# Altium PCB PCB1.PcbDoc
Units mil, origin at the board's own origin, x right, y up, seen from the top; angles counter-clockwise.
Board outline 4900 x 1900 mil, 2 copper layers (Top Layer, Bottom Layer); 41 components, 30 nets, 161 pads, 34 vias.
Unrouted connection lines stored in the file: 4.
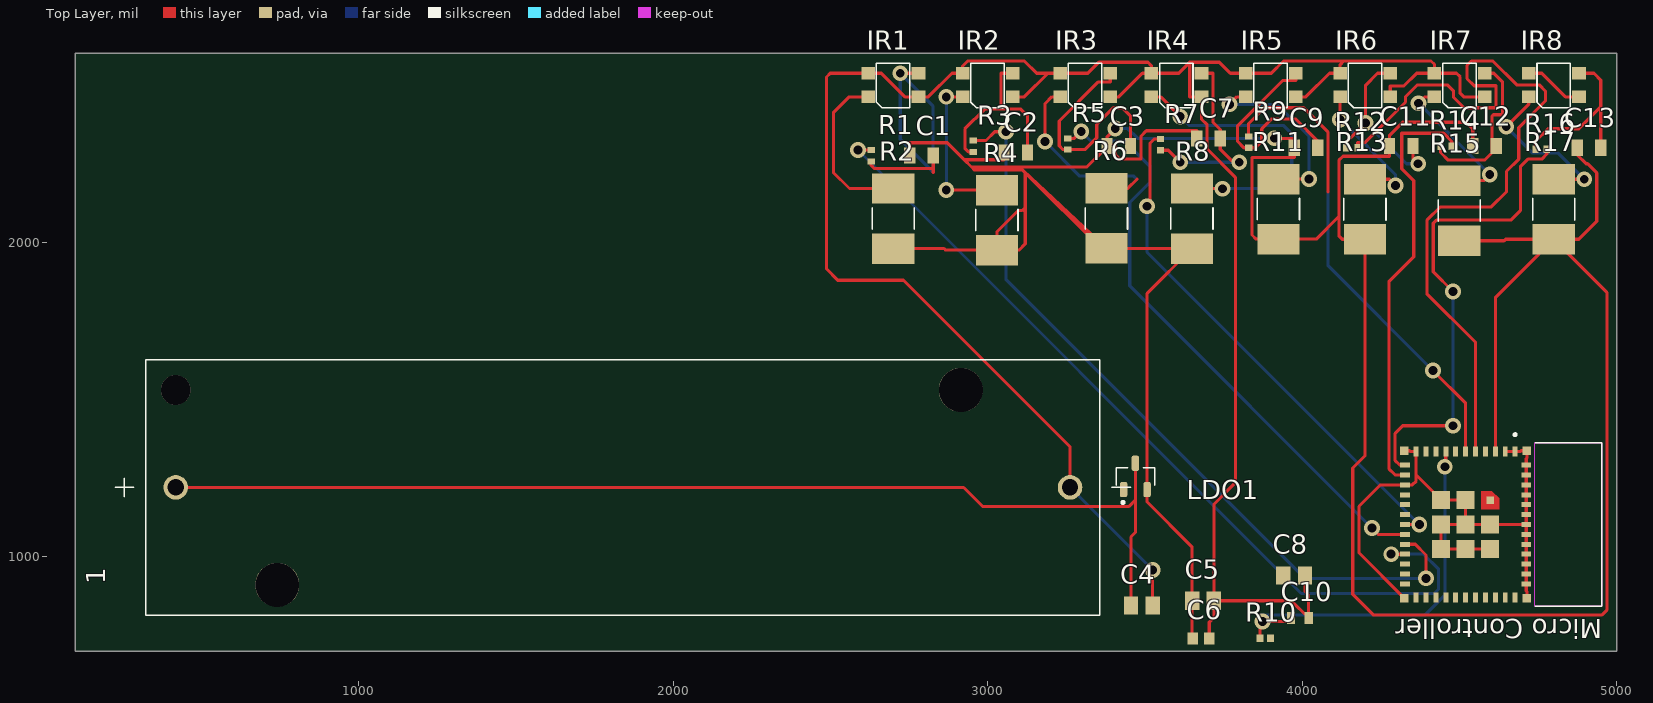
[diagram p0: Top Layer view]
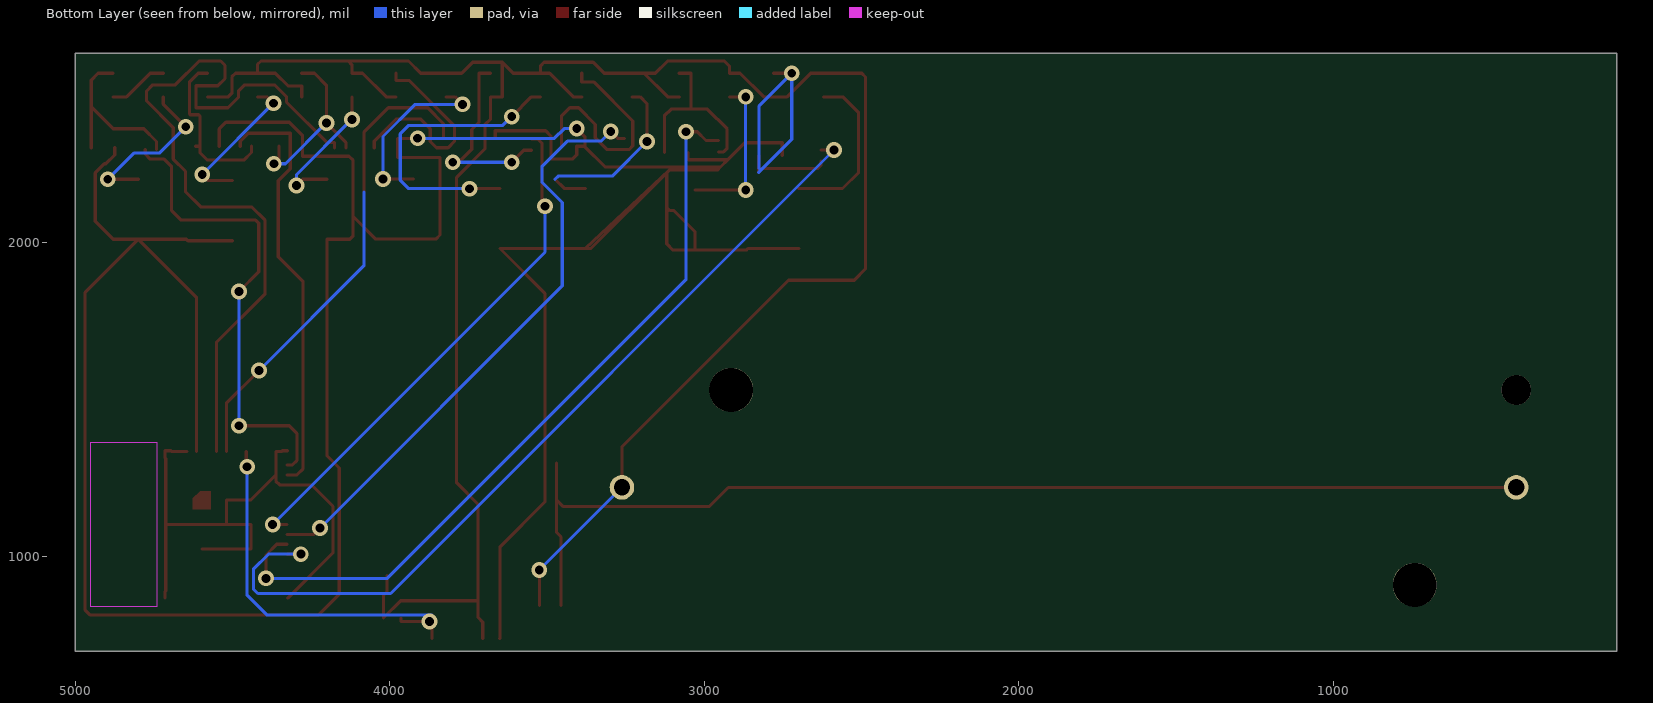
[diagram p1: Bottom Layer view, seen from below]

## Layer stack, top to bottom
Top Solder: solder mask 0.4, Solder Resist, Dk 3.5
Top Layer: signal copper 1.4
Dielectric 1: dielectric 12.6, FR-4, Dk 4.8
Bottom Layer: signal copper 1.4
Bottom Solder: solder mask 0.4, Solder Resist, Dk 3.5

## Board outline
100,700 5000,700 5000,2600 100,2600

## Design rules (kind name [scope] priority, off if disabled: settings)
Clearance [All] p1: gap=10 ignorepadtopadclearanceinfootprint=FALSE except(0: Arc-Hole Track-Hole SMDPad-Hole THPad-Hole Via-Hole Fill-Hole Poly-Hole Region-Hole Text-Hole)
PolygonConnect [All] p1: connectstyle=Relief reliefconductorwidth=10 reliefentries=4 polygonreliefangle="90 Angle" airgapwidth=10
RoomDefinition Sheet2 [InComponentClass('Sheet2')] p1: confinementstyle=ConfineIn formatcopy=TRUE lockcomponents=FALSE outline -2600,-7800 -600,-7800 -600,-6800 -2600,-6800
RoutingVias [All] p1: holewidth=28 width=50 viastyle="Through Hole" minholewidth=28 minwidth=50 maxholewidth=28 maxwidth=50
SolderMaskExpansion [All] p1: expansion=4 istentingtop=FALSE
Width [All] p1: maxlimit=10 minlimit=10 preferedwidth=10
30 further rules are at their usual default settings.

## Classes and differential pairs
component class Sheet2: C1 C2 C3 C7 IR1 IR2 IR3 IR4 R1 R2 R3 R4 R5 R6 R7 R8

## Components (designator, comment, footprint, x,y, rotation, side; value= is the part's Value field where it differs from the comment)
1 "" BAT_1043 1840.59,1220.16 r180 top (schematic designator 3V7)
C1 "10nF" WCAP-CSGP_0805_L2W1.25H1.25 2790,2275 r0 top (schematic designator C13)
C2 "10nF" WCAP-CSGP_0805_L2W1.25H1.25 3090,2285 r0 top (schematic designator C11)
C3 "10nF" WCAP-CSGP_0805_L2W1.25H1.25 3417.6,2305 r0 top (schematic designator C12)
C4 "1pf" CAPC2012X88N 3490.55,845 r0 top (schematic designator C3)
C5 "10pf" CAPC2012X88N 3685,860 r0 top (schematic designator C4)
C6 "0.1uF" CAPC1608X90X35NL10T15 3678.43,740 r0 top (schematic designator C2)
C7 "10nF" WCAP-CSGP_0805_L2W1.25H1.25 3702.4,2330 r0 top (schematic designator C10)
C8 "10uF" CAPC2012X88N 3975,940 r0 top (schematic designator C1)
C9 "10nF" WCAP-CSGP_0805_L2W1.25H1.25 4012.4,2300 r0 top
C10 "1uF" CAPC1608X90N 3993,805 r0 top (schematic designator C5)
C11 "10nF" WCAP-CSGP_0805_L2W1.25H1.25 4315,2305 r0 top (schematic designator C8)
C12 "10nF" WCAP-CSGP_0805_L2W1.25H1.25 4580,2305 r0 top (schematic designator C7)
C13 "10nF" WCAP-CSGP_0805_L2W1.25H1.25 4912.4,2300 r0 top (schematic designator C6)
IR1 "QRE1113GR" 4LEADSMD 2700,2500 r0 top (schematic designator IR8)
IR2 "QRE1113GR" 4LEADSMD 3000,2500 r0 top (schematic designator IR7)
IR3 "QRE1113GR" 4LEADSMD 3310,2500 r0 top (schematic designator IR6)
IR4 "QRE1113GR" 4LEADSMD 3600,2500 r0 top (schematic designator IR5)
IR5 "QRE1113GR" 4LEADSMD 3900,2500 r0 top (schematic designator IR4)
IR6 "QRE1113GR" 4LEADSMD 4200,2500 r0 top (schematic designator IR3)
IR7 "QRE1113GR" 4LEADSMD 4500,2500 r0 top (schematic designator IR2)
IR8 "QRE1113GR" 4LEADSMD 4800,2500 r0 top (schematic designator IR1)
LDO1 "LDO 3.3 regulator" SOT95P237X112-3N 3470,1255 r90 top (schematic designator LDO3V3)
"Micro Controller" "ESP32-C3-MINI-1-N4" XCVR_ESP32-C3-MINI-1-N4 4626.3,1102.24 r270 top
R1 "220" RESC1005X35N 2630,2275 r90 top (schematic designator R18)
R2 "100" RESC6432X75N 2700,2075 r90 top (schematic designator R17)
R3 "220" RESC1005X35N 2955,2305 r90 top (schematic designator R16)
R4 "100" RESC6432X75N 3030,2070 r90 top (schematic designator R15)
R5 "220" RESC1005X35N 3255,2312.01 r90 top (schematic designator R14)
R6 "100" RESC6432X75N 3378,2075.53 r90 top (schematic designator R13)
R7 "220" RESC1005X35N 3550,2310 r90 top (schematic designator R12)
R8 "100" RESC6432X75N 3650,2075 r90 top (schematic designator R11)
R9 "220" RESC1005X35N 3830,2317.99 r90 top (schematic designator R10)
R10 "10K" RESC1005X40N 3882.87,740 r0 top (schematic designator R1)
R11 "100" RESC6432X75N 3925,2105 r90 top (schematic designator R9)
R12 "220" RESC1005X35N 4157.99,2300 r0 top (schematic designator R8)
R13 "100" RESC6432X75N 4200,2104.53 r90 top (schematic designator R6)
R14 "220" RESC1005X35N 4457.99,2305 r0 top (schematic designator R5)
R15 "100" RESC6432X75N 4500,2100 r90 top (schematic designator R4)
R16 "220" RESC1005X35N 4760,2295 r0 top (schematic designator R3)
R17 "100" RESC6432X75N 4800,2104.53 r90 top (schematic designator R2)

## Footprints (in the part's own frame and the unit in brackets; to place one, negate y for a bottom-side part, rotate by r counter-clockwise, add the part's x,y. Pads: shape width x height; smd on the part's side, far side on the other; paste and mask are expansions set on the pad)
4LEADSMD [mm]
  rect 1.1x1 smd: A(-2.01,-0.97) C(2.04,0.94) E(-2.01,0.94) K(2.04,-0.97)
  silkscreen extent -1.35,-1.85 1.35,1.75, body extent -1.7,-2.07 1.7,2.07, height 1.7
BAT_1043 [mm]
  round 1.98 hole 1.32: N(-36.11,0) P(36.11,0)
  round 3.55 hole 3.55 unplated: ""(-27.29,-7.87) ""(27.91,7.87)
  round 2.39 hole 2.39 unplated: ""(36.11,-7.87)
  silkscreen extent -41,-10.32 41,10.32, body extent -38.53,-10.33 38.53,10.33, height 14.86
CAPC1608X90N [mil]
  rect 26x37 smd: 1(-28,0) 2(28,0)
  body extent -37,-16 26,16, height 35
CAPC1608X90X35NL10T15 [mm] "Chip Capacitor, 2-Leads, Body 1.7x0.9mm, IPC Medium Density"
  rect 0.85x0.95 smd: 1(-0.675,0) 2(0.675,0)
  body extent -0.85,-0.45 0.85,0.45, height 0.9
CAPC2012X88N [mm]
  rect 1.16x1.47 smd: 1(-0.875,0) 2(0.875,0)
  body extent -0.87,-0.62 1.12,0.62, height 0.88
RESC1005X35N [mm]
  rect 0.49x0.6 smd: 1(-0.457,0) 2(0.457,0)
  body extent -0.5,-0.25 0.5,0.25, height 0.35
RESC1005X40N [mm]
  rect 0.56x0.6 smd: 1(-0.435,0) 2(0.435,0)
  body extent -0.5,-0.25 0.5,0.25, height 0.37
RESC6432X75N [mm]
  rect 2.46x3.42 smd: 1(-2.425,0) 2(2.425,0)
  silkscreen extent -0.87,-1.7 0.87,1.7, body extent -3.2,-1.6 3.2,1.6, height 0.75
SOT95P237X112-3N [mm]
  rrect50% 1.23x0.59 smd: 1(-1.06,0.95) 2(-1.06,-0.95) 3(1.06,0)
  silkscreen extent -2.2,-1.56 0.7,1.56, body extent -1.18,-1.45 1.18,1.45, height 1.12
WCAP-CSGP_0805_L2W1.25H1.25 [mm] "Ceramic Capacitors, body 2x1.25mm"
  rect 0.9x1.3 smd: 1(-0.95,0) 2(0.95,0)
  body extent -1,-0.63 1,0.63, height 1.25
XCVR_ESP32-C3-MINI-1-N4 [mm]
  rect 0.8x0.4 smd: 1(-5.9,1.3) 2(-5.9,0.5) 3(-5.9,-0.3) 4(-5.9,-1.1) 5(-5.9,-1.9) 6(-5.9,-2.7) 7(-5.9,-3.5) 8(-5.9,-4.3) 9(-5.9,-5.1) 10(-5.9,-5.9) 11(-5.9,-6.7) 25(5.9,-6.7) 26(5.9,-5.9) 27(5.9,-5.1) 28(5.9,-4.3) 29(5.9,-3.5) 30(5.9,-2.7) 31(5.9,-1.9) 32(5.9,-1.1) 33(5.9,-0.3) 34(5.9,0.5) 35(5.9,1.3)
  rect 0.4x0.8 smd: 12(-4.8,-7.6) 13(-4,-7.6) 14(-3.2,-7.6) 15(-2.4,-7.6) 16(-1.6,-7.6) 17(-0.8,-7.6) 18(0,-7.6) 19(0.8,-7.6) 20(1.6,-7.6) 21(2.4,-7.6) 22(3.2,-7.6) 23(4,-7.6) 24(4.8,-7.6) 36(4.8,2.2) 37(4,2.2) 38(3.2,2.2) 39(2.4,2.2) 40(1.6,2.2) 41(0.8,2.2) 42(0,2.2) 43(-0.8,2.2) 44(-1.6,2.2) 45(-2.4,2.2) 46(-3.2,2.2) 47(-4,2.2) 48(-4.8,2.2)
  rect 0.6x0.6 smd paste-1 mask+0: 49_1(-1.975,-0.725)
  rect 1.45x1.45 smd: 49_2(0,-0.725) 49_3(1.975,-0.725) 49_4(1.975,-2.7) 49_5(1.975,-4.675) 49_6(0,-4.675) 49_7(-1.975,-4.675) 49_8(-1.975,-2.7) 49_9(0,-2.7)
  rect 0.7x0.7 smd: 50(5.95,2.25) 51(5.95,-7.65) 52(-5.95,-7.65) 53(-5.95,2.25)
  Top Layer region: -1.25,-1.45 -2.7,-1.45 -2.7,-0.6 -2.1,0 -1.25,0
  Keep-Out Layer region: 6.6,2.9 -6.6,2.9 -6.6,8.3 6.6,8.3
  Keep-Out Layer region: 6.6,2.9 -6.6,2.9 -6.6,8.3 6.6,8.3
  silkscreen extent -7.35,1.2 6.6,8.3, body extent -6.6,-8.3 6.6,8.3, height 2.55

## Part data
1: library part 1043, Package=None, Availability=Unavailable, MP=1043, Price=None
C1 C2 C3 C7 C9 C11 C12 C13: library part 885012007009, "WCAP-CSGP Multilayer Ceramic Chip Capacitor, General Purpose, size 0805, NP0, 10nF, 10V", Capacitance Tolerance=+/-5%, Case/Size Code=0805, Insulation Resistance=10GΩ, Manufacturer="Wurth Elektronik", Max Operating Temperature=125°C, Min Operating Temperature=-55°C, Rated Voltage (DC)=10V, Capacitance=10nF, Category="Multilayer Ceramic Chip Capacitors", Ceramic Type=NP0, ComponentLink1Description="Website Link", ComponentLink1URL=https://www.we-online.com/redexpert/article/885012007009?ad, ComponentLink2Description="Datasheet Link", ComponentLink2URL=https://www.we-online.com/redexpert/spec/885012007009?ad, Height=1.25mm, Length=2mm, Manufacturer Part Number=885012007009, Match Code=WCAP-CSGP, Mount="Surface Mount", Packaging="Tape and Reel", Q Factor=1000, Technical Reference=NP00805103J010DFCT10000, Width=1.25mm
C4 C5: library part C0805C100K5RAC7800, Package=None, Availability=Unavailable, MP=C0805C100K5RAC7800, Price=None
C6: library part CMP-2100-03643-1, "Chip Capacitor, 0.1 uF, +/- 10%, 50 V, -55 to 125 degC, 0603 (1608 Metric), RoHS, Tape and Reel", Capacitance=100nF, Case Code (Imperial)=0603, Case Code (Metric)=1608, Dielectric=X7R, Dielectric Material=Ceramic, Insulation Resistance=10GR, Manufacturer=Murata, Max Operating Temperature=125degC, Min Operating Temperature=-55degC, Package Description="2-Pin Surface Mount Device, Body 1.6 x 0.8 mm", Package Quantity=1, Tolerance=10%, Voltage=50V, Case/Package=0603, Contact Plating=Tin, Datasheet URL=http://psearch.en.murata.com/capacitor/product/GRM188R71H104KA93%23.pdf, Datasheet Version=42675.0, Depth=0.8mm, Height=0.8mm, Lead Free=LeadFree, Length=1.6mm, Manufacturer URL=http://www.murata.com/, Material=Ceramic, Mount=SurfaceMount, Number of Pins=2, Package Reference=0603, Packaging=TapeandReel, Radiation Hardening=No, REACH SVHC=NoSVHC, RoHSCompliant=true, Termination=SMD/SMT, Thickness=0.035inch, Voltage Rating=50V, Voltage Rating (DC)=50V, Width=0.8mm
C8: library part CMP-13271-004224-1, "Cap Ceramic 10uF 25V X5R ±20% Pad SMD 0603 +85°C T/R", Case Code (Imperial)=0603, Case Code (Metric)=1608, Dielectric=X5R, Max Operating Temperature=85°C, Min Operating Temperature=-55°C, Package Quantity=1, Tolerance=20%, Voltage Rating=25V, Capacitance=10uF, Case/Package=0603, Contact Plating=Tin, Lead Free="Lead Free", Length=0.063inch, Mount="Surface Mount", Packaging="Tape and Reel", Termination=Wraparound, Thickness=0.035inch, Width=0.031inch
C10: library part CL10B105KO8NNNC, "1ÂµF Â±10% 16V Ceramic Capacitor X7R 0603 (1608 Metric)", Package="0603 Samsung", Arrow_Electronics-Purchase-URL=https://snapeda.com/shop?store=Arrow+Electronics&id=3597999, BuyPart=https://www.snapeda.com/parts/CL10B105KO8NNNC/Samsung%20Electro-Mechanics/view-part/3597999/?ref=eda, Digi-Key_Part_Number=1276-1019-1-ND, DigiKey-Purchase-URL=https://snapeda.com/shop?store=DigiKey&id=3597999, MF="Samsung Electro-Mechanics", MP=CL10B105KO8NNNC, SnapEDA_Link=https://www.snapeda.com/parts/CL10B105KO8NNNC/Samsung%20Electro-Mechanics/view-part/3597999/?ref=snap
IR1 IR2 IR3 IR4 IR5 IR6 IR7 IR8: "Optical Switches, Reflective, Phototransistor Output Reflective Sensor", Package=None, Check_prices=https://www.snapeda.com/parts/QRE1113/SparkFun/view-part/?ref=eda, MF=SparkFun, MP=QRE1113, SnapEDA_Link=https://www.snapeda.com/parts/QRE1113/SparkFun/view-part/?ref=snap
LDO1: library part MCP1700T-3002E/TT, "25V 10uF X5R ±20% 0603 Multilayer Ceramic Capacitors MLCC - SMD/SMT ROHS", Capacitance=10uF, Case Code (Imperial)=0603, Case Code (Metric)=1608, Manufacturer=Samsung, Manufacturer Part Number=CL10A106MA8NRNC, Max Operating Temperature=85°C, Min Operating Temperature=-55°C, Package="SOT-23 Microchip", Tolerance=20%, Voltage Rating=25V, Availability=Unavailable, Case/Package=0603, Category="Ceramic Capacitors", ComponentLink1Description=https://datasheet.ciiva.com/25766/cl10a106ma8nrnc-25766562.pdf?src-supplier=Digikey, ComponentLink1URL=https://datasheet.ciiva.com/25766/cl10a106ma8nrnc-25766562.pdf?src-supplier=Digikey, Height=900um, Lead Free="Lead Free", Material=Ceramic, MF=Microchip, Mount="Surface Mount", MP=MCP1700T-3002E/TT, Packaging="Cut Tape", Price=None, Pricing 1="4000=0.01575 (USD)", RoHS=Yes, RoHS Compliant=Yes, Series=CL, SnapEDA_Link=https://www.snapeda.com/parts/MCP1700T-3002E/TT/Microchip/view-part/48518/?ref=snap, Stock 1=9192000, Supplier 1=Avnet, Supplier Part Number 1=CL10A106MA8NRNC
"Micro Controller": "Pwr Sply Func, Voltage Regulator, LDO, SOT-89, PD 1.635W, VO 3.3V, Regline +/-0.75%/V", Case/Package=SOT-89, Dropout Voltage=178mV, Input Bias Current=1.6uA, Manufacturer=Microchip, Manufacturer Part Number=MCP1700T-3302E/MB, Max Input Voltage=6V, Max Operating Temperature=125°C, Max Output Current=250mA, Max Output Voltage=3.3V, Max Power Dissipation=1.635W, Min Input Voltage=2.3V, Min Operating Temperature=-40°C, Output Voltage Accuracy=2%, Package="SMD-53 Espressif Systems", Package Quantity=1000, Quiescent Current=4uA, Accuracy=3%, Category="Voltage Regulators - Linear", Check_prices=https://www.snapeda.com/parts/ESP32-C3-MINI-1-N4/Espressif+Systems/view-part/?ref=eda, Height=1.6mm, Lead Free="Lead Free", Length=4.6mm, Max Supply Voltage=6V, MF="Espressif Systems", Min Output Voltage=3.3V, Min Supply Voltage=2.3V, Mount="Surface Mount", MP=ESP32-C3-MINI-1-N4, Nominal Output Voltage=3.3V, Number of Channels=1, Number of Outputs=1, Number of Pins=3, Output Current=250mA, Output Type=Fixed, Output Voltage=3.3V, Packaging="Tape and Reel", Polarity=Positive, Power Dissipation=1.635W, Pricing 1="1=0.4806, 10=0.4731, 25=0.4655, 100=0.458, 250=0.4505, 500=0.4429 (USD)", Radiation Hardening=No, Reach SVHC Compliant=No, RoHS=Yes, RoHS Compliant=Yes, SnapEDA_Link=https://www.snapeda.com/parts/ESP32-C3-MINI-1-N4/Espressif+Systems/view-part/?ref=snap, Stock 1=650, Supplier 1="Arrow Electronics", Supplier Part Number 1=MCP1700T-3302E/MB, Supply Current=4uA, Termination=SMD/SMT, Width=2.29mm
R1 R3 R5 R7 R9 R12 R14 R16: library part CPF0402B220RE1, "Resistencia de pelÃ­cula delgada de precisiÃ³n SMD, carcasa 0402, 220 ohmios +/-0,1 %, 063 W +/-25 ppm/C", Package=0402, Power_Rating=".063 W", Tolerance=.1%, Voltage_Rating="25 V", Check_prices=https://www.snapeda.com/parts/CPF0402B220RE1/TE+Connectivity/view-part/?ref=eda, EU_RoHS_Compliance=Compliant, MF="TE Connectivity", MP=CPF0402B220RE1, Resistance=220, SnapEDA_Link=https://www.snapeda.com/parts/CPF0402B220RE1/TE+Connectivity/view-part/?ref=snap
R2 R4 R6 R8 R11 R13 R15 R17: library part CRS2512-FX-1000ELF, "CRS Series Anti-surge Resistor 2512 Case 100Ohms 2W +/-100ppm/degC", Package="6432 Bourns", Check_prices=https://www.snapeda.com/parts/CRS2512-FX-1000ELF/Bourns/view-part/?ref=eda, MF=Bourns, MP=CRS2512-FX-1000ELF, SnapEDA_Link=https://www.snapeda.com/parts/CRS2512-FX-1000ELF/Bourns/view-part/?ref=snap
R10: library part CRG0402J10K/10, "CRG0402 chip resistor,10K 5% 0.063W", Package=0402, Power_Rating=".063 W", Tolerance=5%, Voltage_Rating="50 V", Check_prices=https://www.snapeda.com/parts/CRG0402J10K/10/TE+Connectivity+Passive+Product/view-part/?ref=eda, EU_RoHS_Compliance="Compliant with Exemptions", MF="TE Connectivity", MP=CRG0402J10K/10, Resistance=10K, SnapEDA_Link=https://www.snapeda.com/parts/CRG0402J10K/10/TE+Connectivity+Passive+Product/view-part/?ref=snap

## Via types
v1: diameter 50, hole 28, Top Layer to Bottom Layer, 34 vias

## Nets (pads, with @x,y where several pads share a name; then routed paths per layer and width w, separated by ;. In a path a pad name is that pad's centre, name@x,y a point inside that pad or via, vN(x,y) a via of type N, cw(c..) or ccw(c..) an arc to the next point about the centre after c; other vN are vias at no path point)
3V3: "Micro Controller.3" C1.1 C2.1 C3.1 C5.1 C6.1 C7.1 C9.1 C11.1 C12.1 C13.1 LDO1.2 R2.1 R4.1 R6.1 R8.1 R11.1 R13.1 R15.1 R17.1 | length 11687.3
  Top Layer w10: R2.1 2862,1979.53 2867,1974.53 R4.1 ; C1.1 2752.6,2315.82 2872.18,2315.82 2926,2262 ; C2.1 3052.6,2262 2926,2262 ; R6.1 3112,2229 ; v1(3406,2361) 3380.2,2335.2 C3.1 ; C6.1 3650.55,740 C5.1 3650.55,1030.45 3507.4,1173.6 LDO1.2 3507.4,1836.93 R8.1 3513.53,1979.53 3378,1979.53 3361.47,1979.53 3120,2221 ; C7.1 3665,2354 3505,2354 3488,2337 3488,2264 3420,2264 3406,2278 3406,2305 C3.1 ; v1(3912,2330) 3975,2330 C9.1 3975,2269 3841,2269 3841,2022.53 3854,2009.53 R11.1 4045,2009.53 4117,2081.53 ; R15.1 4642.47,2004.53 4647,2009.06 R17.1 ; C12.1 4542.6,2360 4521.6,2381 4320,2381 4277.6,2338.6 C11.1 4277.6,2273 4130,2273 4117,2260 4117,2081.53 ; 4614.49,1334.53 4614.49,1823.54 R17.1 ; C13.1 4875,2277 4903,2249 4908,2249 4937,2220 4937,2066.06 4880,2009.06 R17.1 ; 2926,2262 2949,2239 ; 2949,2239 2959,2229 3112,2229 ; 2949,2239 3315.8,2239 3380.2,2303.39 C3.1 ; R4.1 3100,1974.53 3120,1994.53 3120,2110 ; R4.1 3030,2033 3097,2100 3110,2100 3120,2110 ; 3112,2229 3120,2221 ; 3120,2110 3120,2221 ; 4117,2081.53 4117,2020 4127.94,2009.06 R13.1 4200,1321 4161,1282 4161,880 4226,815 4954,815 4969,830 4969,1840.06 R17.1
  Bottom Layer w10: v1(3406,2361) 3446,2361 3477,2330 v1(3912,2330)
EN: "Micro Controller.8" C10.1 R10.1 | length 1278.9
  Top Layer w10: R10.1 v1@3865.75,814.75 ; v1(3874,794) 3965,794 C10.1 ; v1(4454,1286) 4457.01,1289.01 4457.01,1334.53
  Bottom Layer w10: v1@3865.75,814.75 3894.75,814.75 ; v1(3874,794) 3894.75,814.75 ; v1(4454,1286) 4454,877 4391.75,814.75 3894.75,814.75
GND: 1.N C4.2 C5.2 C6.2 C8.2 C10.2 IR1.E IR1.K IR2.E IR2.K IR3.E IR3.K IR4.E IR4.K IR5.E IR5.K IR6.E IR6.K IR7.E IR7.K | length 7745.1
  Top Layer w10: IR2.K 3117,2461.81 3192.2,2537.01 ; 1.N 3262.24,1349.76 2733,1879 2524,1879 2488,1915 2488,2525.01 2500,2537.01 IR1.E 2662,2537.01 2737.2,2461.81 IR1.K 2812,2461.81 2887.2,2537.01 IR2.E 2920.87,2560 2936.87,2576 3117,2576 3155.99,2537.01 3192.2,2537.01 ; IR3.K 3417,2461.81 3492.2,2537.01 IR4.E ; C4.2 v1(3525,957.4) ; C6.2 3705,792 3719.45,806.45 C5.2 ; IR5.K 4012,2461.81 4087.2,2537.01 IR6.E 4120.87,2564 4132.87,2576 ; C8.2 4009.45,889.1 4021,877.55 C10.2 3966,860 C5.2 ; IR6.K 4280.32,2496.92 4324,2496.92 4364.09,2537.01 IR7.E ; IR7.K 4513.78,2461.81 4502.56,2473.03 4502.56,2525.36 4490.9,2537.01 IR7.E ; 3192.2,2537.01 IR3.E 3319.01,2537.01 3354,2572 3510,2572 3520.87,2561.13 IR4.E ; IR4.E 3608.01,2537.01 3643,2572 ; 3643,2572 3643,2461.81 IR4.K 3680.32,2390.65 3698,2372.97 3698,2296 3788,2206 3788,1234.55 3719.45,1166 C5.2 ; 3643,2572 3737,2572 3771.99,2537.01 IR5.E 3902.01,2537.01 3941,2576 4132.87,2576 ; 4132.87,2576 4410,2576 4420.87,2565.13 IR7.E
  Bottom Layer w10: 1.N v1(3525,957.4)
GPIO0: "Micro Controller.12" R16.2 | length 1536.8
  Top Layer w10: 4327.09,1291.22 4310,1291.22 4296,1305.22 4296,1392 4320,1416 v1(4480,1416) ; v1(4480,1843) 4417,1906 4417,2060 4427,2070 4664,2070 4694,2100 4694,2240 4718,2264 4761.99,2264 4777.99,2280 R16.2
  Bottom Layer w10: v1(4480,1416) v1(4480,1843)
GPIO1: "Micro Controller.13" R14.2 | length 1358.8
  Top Layer w10: 4327.09,1259.72 4296.28,1259.72 4276,1280 4276,1874 4355,1953 4355,2195.08 4316.95,2233.13 4316.95,2346 4449.98,2346 4475.98,2320 R14.2
GPIO2: "Micro Controller.5" R12.2 | length 2555
  Top Layer w10: R12.2 4175.98,2317 4201,2317 4329,2445 4329,2462 4367,2500 4462,2500 4482,2480 4482,2460 4515,2427 4616.97,2427 4616.97,2497 4547.56,2497 4524.56,2520 4524.56,2562 4538.4,2575.85 4606.15,2575.85 4682,2500 4754,2500 4774,2480 4774,2449 4689,2364 4689,2264 4650,2225 4650,2160 4602,2112 4440,2112 4397,2069 4397,1836 4551.5,1681.5 4551.5,1334.53
GPIO3: "Micro Controller.6" R9.2 | length 1542.5
  Top Layer w10: R9.2 3830,2377 3880,2427 4005,2427 4083,2349 4083,2159 ; v1(4416,1592) 4520,1488 4520,1334.53
  Bottom Layer w10: 4083,2159 4083,1925 v1(4416,1592)
NetC1_2: C1.2 IR1.C R1.1 | length 1028.8
  Top Layer w10: R1.1 2630,2244 2640,2234 2826.1,2234 ; v1(2722.42,2537.01) IR1.C ; 2827.4,2221.9 C1.2
  Bottom Layer w10: 2826.1,2234 2826.1,2433.33 v1(2722.42,2537.01) 2722.42,2326.89 2827.4,2221.9
NetC2_2: C2.2 IR2.C R3.1 | length 595.8
  Top Layer w10: R3.1 2938.99,2287.01 2928,2298 2928,2360 2991,2423 3043,2423 ; IR2.C 3043,2537.01 3043,2423 ; C2.2 3127.4,2401.6 3106,2423 3043,2423
NetC3_2: C3.2 IR3.C R5.1 | length 738.3
  Top Layer w10: IR3.C 3390.32,2509.32 3352.32,2509.32 3228,2385 3228,2306.02 3240,2294.02 R5.1 3309.02,2294.02 3347,2332 3347,2374 3400,2427 3428,2427 3455,2400 C3.2
NetC7_2: C7.2 IR4.C R7.1 | length 630.9
  Top Layer w10: R7.1 3574.99,2292.01 v1(3613,2254) ; IR4.C 3717,2537.01 3717,2380.8 3739.8,2358 C7.2 3739.8,2295.2 3781,2254 v1(3800,2254)
  Bottom Layer w10: v1(3613,2254) v1(3800,2254)
NetC9_2: C9.2 IR5.C R9.1 | length 693
  Top Layer w10: IR5.C 3980.32,2514 3938.71,2514 3795,2370.29 3795,2320 3815,2300 R9.1 3852,2300 3872,2320 3872,2360 3903.68,2391.68 3979.32,2391.68 4049.8,2321.2 C9.2
NetC11_2: C11.2 IR6.C R12.1 | length 602.5
  Top Layer w10: R12.1 4140,2317 v1(4202,2379) 4202,2499.01 4240,2537.01 IR6.C ; C11.2 4352.4,2265.6 v1(4369,2249)
  Bottom Layer w10: v1(4202,2379) 4332,2249 v1(4369,2249)
NetC12_2: C12.2 IR7.C R14.1 | length 539.8
  Top Layer w10: R14.1 4440,2285 4464.32,2260.68 4580,2260.68 4604.18,2284.86 C12.2@4604.18,2305 ; IR7.C 4610,2537.01 4636.97,2510.04 4636.97,2407.05 4635,2405.08 4608.08,2405.08 4604.18,2401.18 C12.2@4604.18,2305 ; C12.2 C12.2@4604.18,2305
NetC13_2: C13.2 IR8.C R16.1 | length 572.2
  Top Layer w10: R16.1 4742.01,2320 4782.6,2360.59 4880,2360.59 4949.8,2430.4 ; IR8.C 4928,2537.01 4949.8,2515.2 4949.8,2430.4 ; C13.2 4949.8,2430.4
NetIR1_A: IR1.A R2.2 | length 533
  Top Layer w10: IR1.A 2560,2461.81 2510,2411.81 2510,2221.47 2561,2170.47 R2.2
NetIR2_A: IR2.A R4.2 | length 509.2
  Top Layer w10: v1(2869,2165.47) R4.2 ; v1(2869,2461.81) IR2.A
  Bottom Layer w10: v1(2869,2165.47) v1(2869,2461.81)
NetIR3_A: IR3.A R6.2 | length 627.9
  Top Layer w10: v1(3182.81,2320.19) 3182.81,2440 3204.62,2461.81 IR3.A ; R6.2 3446,2171 3475,2200
  Bottom Layer w10: v1(3182.81,2320.19) 3293,2210 3465,2210 3475,2200
NetIR4_A: IR4.A R8.2 | length 970.3
  Top Layer w10: IR4.A 3550.19,2461.81 v1(3613,2399) ; R8.2 3746.53,2170.47 v1(3747,2170)
  Bottom Layer w10: v1(3613,2399) 3641,2371 3940,2371 3967,2344 3967,2197 3940,2170 v1(3747,2170)
NetIR5_A: IR5.A R11.2 | length 589.5
  Top Layer w10: v1(3769,2438) 3792.81,2461.81 IR5.A ; R11.2 v1(4022,2200.47)
  Bottom Layer w10: v1(3769,2438) 3920,2438 4022,2336 v1(4022,2200.47)
NetIR6_A: IR6.A R13.2 | length 460.1
  Top Layer w10: v1(4120.87,2390.13) IR6.A ; R13.2 4277,2200 v1(4297,2180)
  Bottom Layer w10: v1(4120.87,2390.13) 4297,2214 v1(4297,2180)
NetIR7_A: IR7.A R15.2 | length 484.2
  Top Layer w10: v1(4370.5,2441.5) 4390.81,2461.81 IR7.A ; R15.2 4577.47,2195.47 v1(4597,2215)
  Bottom Layer w10: v1(4370.5,2441.5) v1(4597,2215)
NetIR8_A: IR8.A R17.2 | length 538.8
  Top Layer w10: v1(4649,2367) 4720.87,2438.87 IR8.A ; R17.2 v1(4897,2200)
  Bottom Layer w10: v1(4649,2367) 4733,2283 4814,2283 v1(4897,2200)
NetIR8_E: IR8.E IR8.K | length 190.6
  Top Layer w10: IR8.E 4762,2537.01 4837.2,2461.81 IR8.K
"NetMicro Controller_1": "Micro Controller.1" "Micro Controller.2" "Micro Controller.11" "Micro Controller.14" "Micro Controller.36" "Micro Controller.37" "Micro Controller.38" "Micro Controller.39" "Micro Controller.40" "Micro Controller.41" "Micro Controller.42" "Micro Controller.43" "Micro Controller.44" "Micro Controller.45" "Micro Controller.46" "Micro Controller.47" "Micro Controller.48" "Micro Controller.49_1" "Micro Controller.49_2" "Micro Controller.49_3" "Micro Controller.49_4" "Micro Controller.49_5" "Micro Controller.49_6" "Micro Controller.49_7" "Micro Controller.49_8" "Micro Controller.49_9" "Micro Controller.50" "Micro Controller.51" "Micro Controller.52" "Micro Controller.53" | length 2011.2
  Top Layer w10: 4325.12,867.99 4181,1012.11 4181,1160 4249.23,1228.23 4327.09,1228.23 4350.75,1228.23 4362.52,1240 4362.52,1259.72 ; 4325.12,1336.5 4342,1336.5 4343.97,1334.53 4362.52,1334.53 4362.52,1259.72 ; 4597.76,1024.49 4520,1024.49 4442.24,1024.49 4442.24,1102.24 4520,1102.24 ; 4645.98,1334.53 4677.48,1334.53 4695,1334.53 4696.97,1336.5 4714.88,1336.5 4714.88,1313.97 4712.91,1312 4712.91,1291.22 4712.91,1259.72 4712.91,1228.23 4712.91,1196.73 4712.91,1165.24 4712.91,1133.74 4712.91,1102.24 ; 4714.88,867.99 4714.88,889 4712.91,890.97 4712.91,913.27 4712.91,944.76 4712.91,976.26 4712.91,1007.76 4712.91,1039.25 4712.91,1070.75 4712.91,1102.24 ; 4362.52,1259.72 4442.24,1180 4520,1180 4520,1102.24 ; 4520,1102.24 4597.76,1102.24 4712.91,1102.24
"NetMicro Controller_18": "Micro Controller.18" R7.2 | length 1659.9
  Top Layer w10: v1(3507,2114) 3517,2124 3517,2315 3529.99,2327.99 R7.2 ; 4327.09,1102.24 v1(4373,1102.24)
  Bottom Layer w10: v1(3507,2114) 3507,1968.24 v1(4373,1102.24)
"NetMicro Controller_19": "Micro Controller.19" R5.2 | length 1925.8
  Top Layer w10: R5.2 3276,2330 v1(3298,2352) ; v1(4222,1091) 4242.25,1070.75 4327.09,1070.75
  Bottom Layer w10: v1(3298,2352) 3329,2321 3436,2321 3517,2240 3517,2191 3452,2126 3452,1861 v1(4222,1091)
"NetMicro Controller_20": "Micro Controller.20" R3.2 | length 2469.9
  Top Layer w10: R3.2 2994.99,2322.99 3023,2351 v1(3059,2351) ; 4327.09,1039.25 4360,1039.25 4394,1005.25 v1(4394,931)
  Bottom Layer w10: v1(3059,2351) 3059,1880 4008,931 v1(4394,931)
"NetMicro Controller_21": "Micro Controller.21" R1.2 | length 2755.5
  Top Layer w10: v1(2588,2292.99) R1.2 ; v1(4283.2,1008) 4283.44,1007.76 4327.09,1007.76
  Bottom Layer w10: v1(2588,2292.99) 3997.99,883 4420,883 4434,897 4434,960 4386,1008 v1(4283.2,1008)
VCC: 1.P C4.1 LDO1.3 | length 3541.8
  Top Layer w10: 1.P 418.94,1220 2924,1220 2984,1160 3450,1160 3470,1180 ; C4.1 3456.1,1063 3470,1076.9 3470,1180 ; LDO1.3 3470,1180
pads on no net: 1. "Micro Controller.4" "Micro Controller.7" "Micro Controller.9" "Micro Controller.10" "Micro Controller.15" "Micro Controller.16" "Micro Controller.17" "Micro Controller.22" "Micro Controller.23" "Micro Controller.24" "Micro Controller.25" "Micro Controller.26" "Micro Controller.27" "Micro Controller.28" "Micro Controller.29" "Micro Controller.30" "Micro Controller.31" "Micro Controller.32" "Micro Controller.33" "Micro Controller.34" "Micro Controller.35" C8.1 LDO1.1 R10.2

## Polygon pours and split planes (outlines as drawn)
no net on Layer0 "Default Coverlay 1 Top" (split plane): 100,700 5000,700 5000,2600 100,2600
no net on Layer0 "Default Coverlay 1 Bottom" (split plane): 100,700 5000,700 5000,2600 100,2600